# Altium PCB Tigershark 3D R2.PcbDoc (part 2 of 4)
Units mil, origin at the board's own origin, x right, y up, seen from the top; angles counter-clockwise.
Board outline 4100 x 4050 mil, 4 copper layers (Top Layer, Groun Plane, Power Plane, Bottom Layer), stack 61.73 mil thick; 349 components, 235 nets, 1133 pads, 579 vias.
Unrouted connection lines stored in the file: 67.
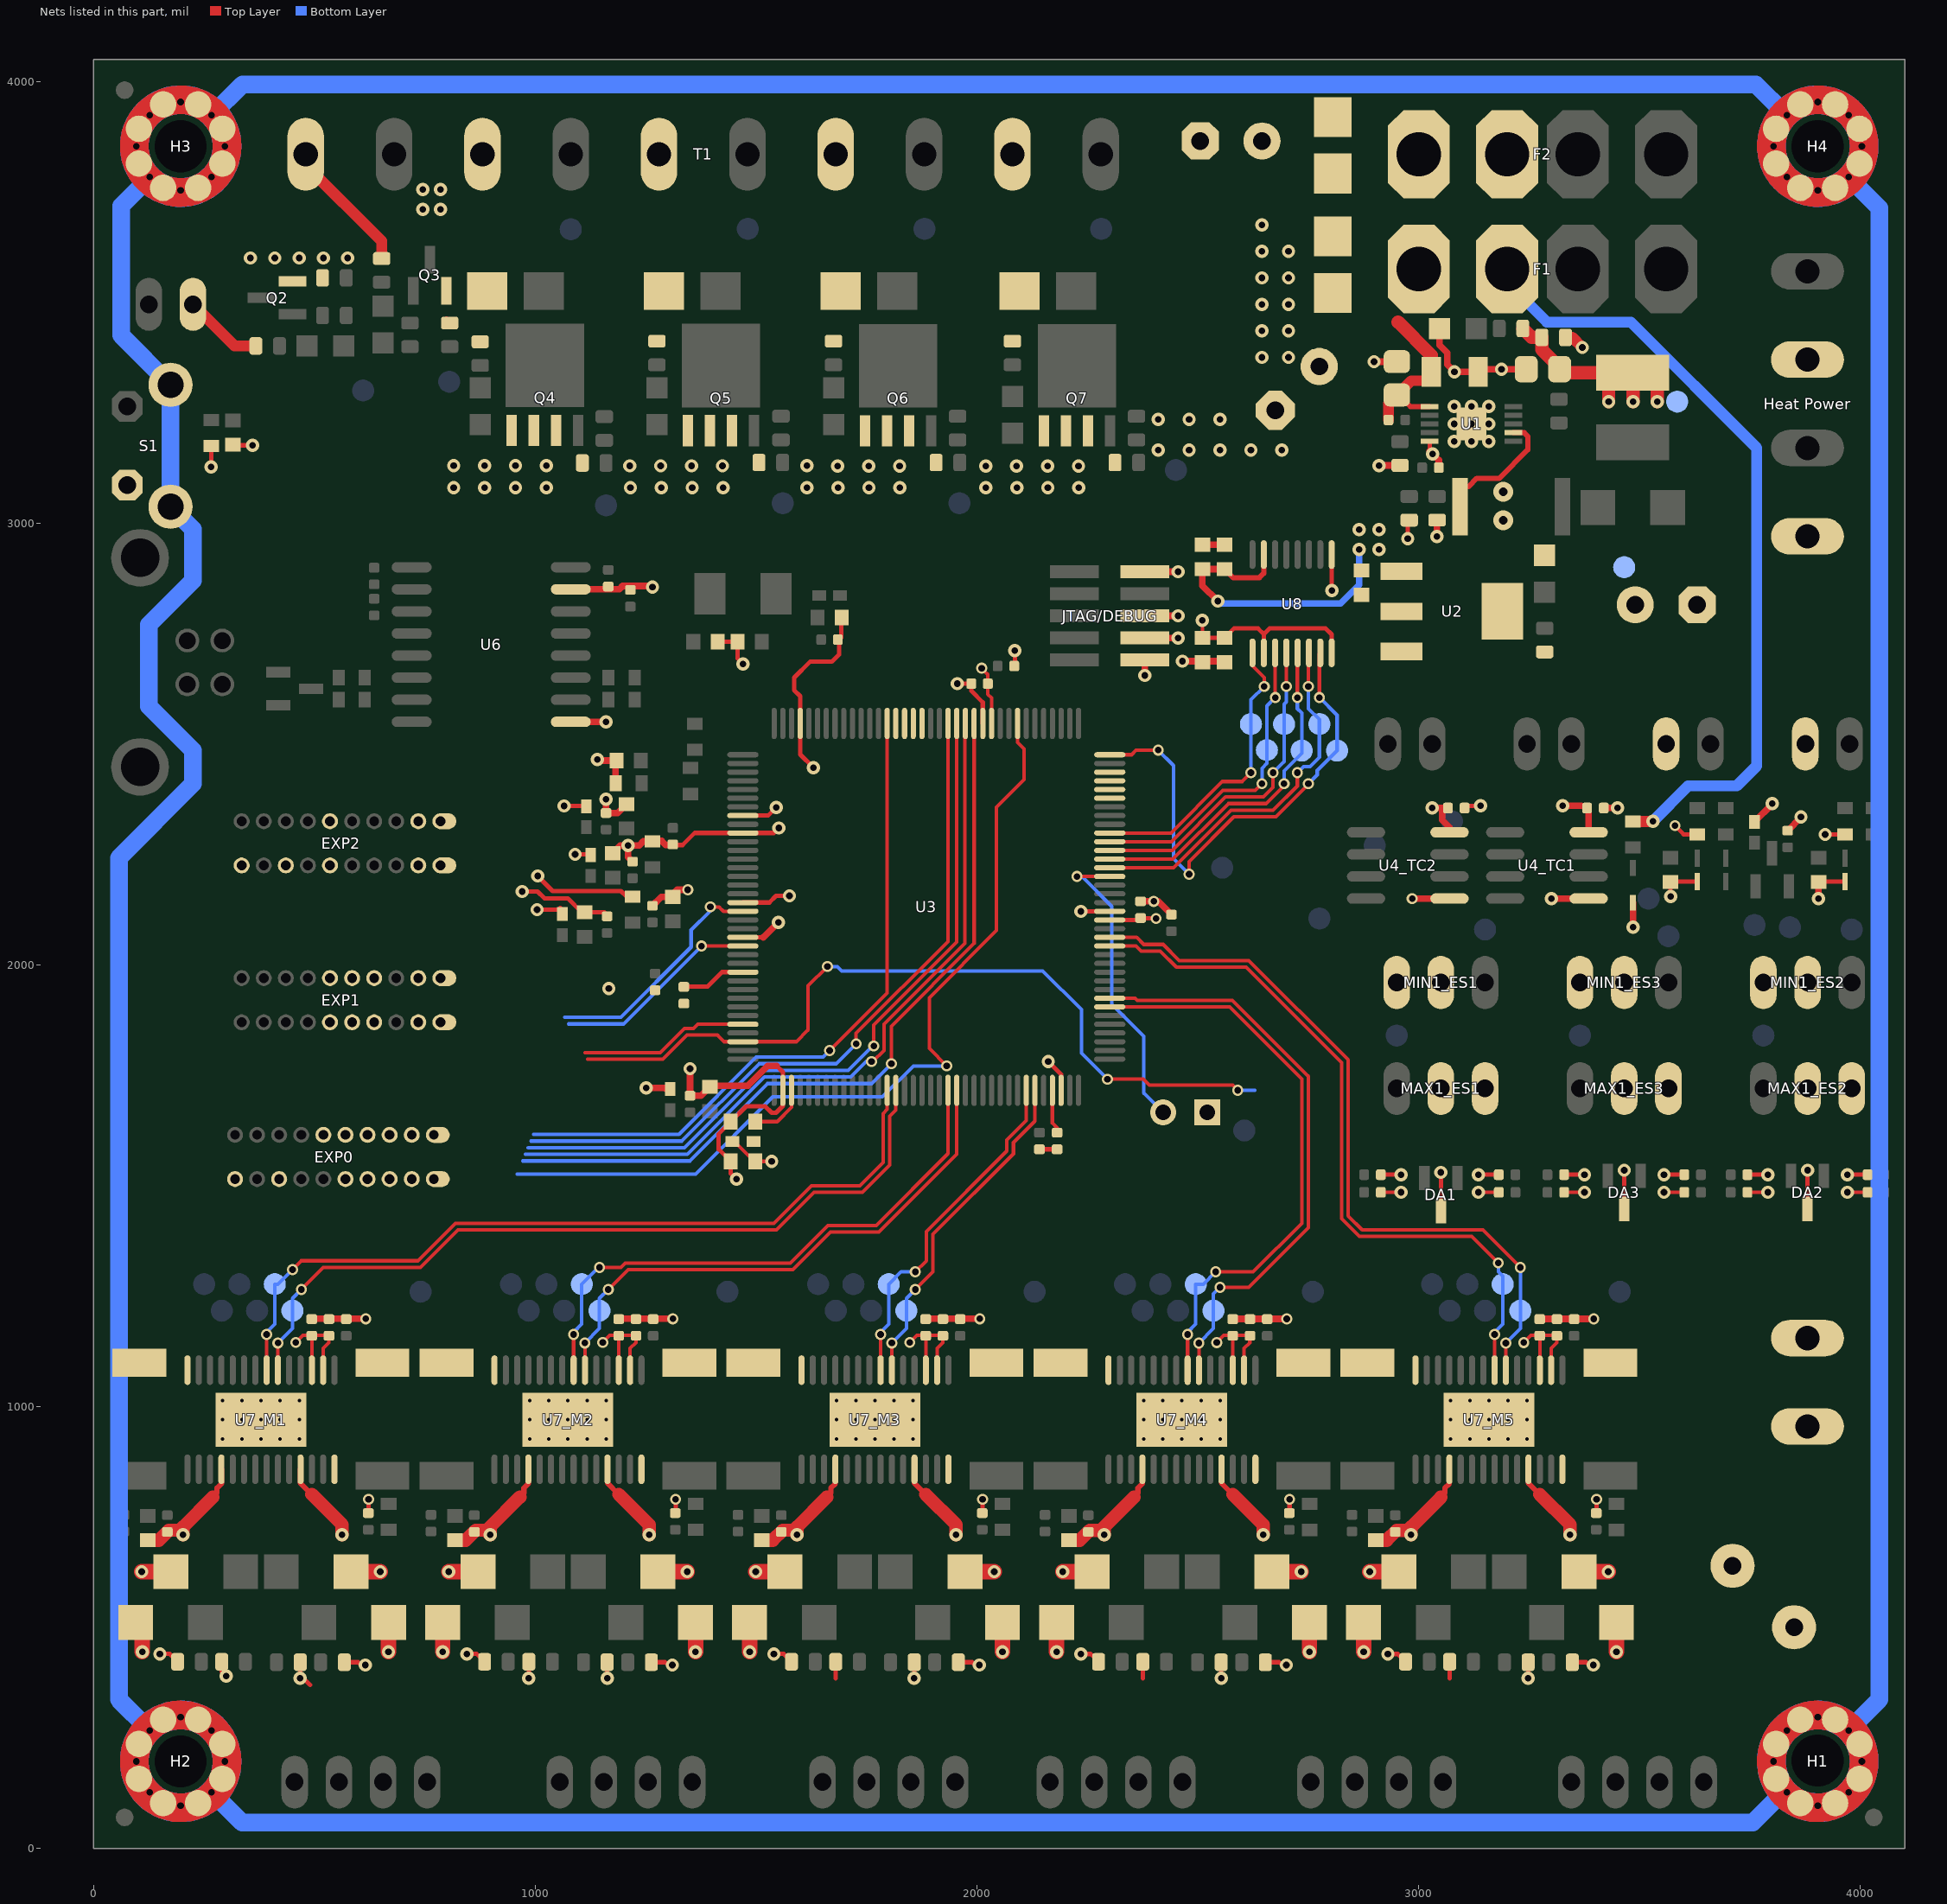
[diagram p4: the nets of this part, all layers, seen from the top]

## Footprints (in the part's own frame and the unit in brackets; to place one, negate y for a bottom-side part, rotate by r counter-clockwise, add the part's x,y. Pads: shape width x height; smd on the part's side, far side on the other; paste and mask are expansions set on the pad) (continued)
LQFP144_N [mm] "Thin QFP, 144-Leads, Body 20x20mm, Pitch 0.5mm, IPC Medium Density"
  oval 1.8x0.3 smd: 1(-10.55,8.75) 2(-10.55,8.25) 3(-10.55,7.75) 4(-10.55,7.25) 5(-10.55,6.75) 6(-10.55,6.25) 7(-10.55,5.75) 8(-10.55,5.25) 9(-10.55,4.75) 10(-10.55,4.25) 11(-10.55,3.75) 12(-10.55,3.25) 13(-10.55,2.75) 14(-10.55,2.25) 15(-10.55,1.75) 16(-10.55,1.25) 17(-10.55,0.75) 18(-10.55,0.25) 19(-10.55,-0.25) 20(-10.55,-0.75) 21(-10.55,-1.25) 22(-10.55,-1.75) 23(-10.55,-2.25) 24(-10.55,-2.75) 25(-10.55,-3.25) 26(-10.55,-3.75) 27(-10.55,-4.25) 28(-10.55,-4.75) 29(-10.55,-5.25) 30(-10.55,-5.75) 31(-10.55,-6.25) 32(-10.55,-6.75) 33(-10.55,-7.25) 34(-10.55,-7.75) 35(-10.55,-8.25) 36(-10.55,-8.75) 73(10.55,-8.75) 74(10.55,-8.25) 75(10.55,-7.75) 76(10.55,-7.25) 77(10.55,-6.75) 78(10.55,-6.25) 79(10.55,-5.75) 80(10.55,-5.25) 81(10.55,-4.75) 82(10.55,-4.25) 83(10.55,-3.75) 84(10.55,-3.25) 85(10.55,-2.75) 86(10.55,-2.25) 87(10.55,-1.75) 88(10.55,-1.25) 89(10.55,-0.75) 90(10.55,-0.25) 91(10.55,0.25) 92(10.55,0.75) 93(10.55,1.25) 94(10.55,1.75) 95(10.55,2.25) 96(10.55,2.75) 97(10.55,3.25) 98(10.55,3.75) 99(10.55,4.25) 100(10.55,4.75) 101(10.55,5.25) 102(10.55,5.75) 103(10.55,6.25) 104(10.55,6.75) 105(10.55,7.25) 106(10.55,7.75) 107(10.55,8.25) 108(10.55,8.75)
  oval 0.3x1.8 smd: 37(-8.75,-10.55) 38(-8.25,-10.55) 39(-7.75,-10.55) 40(-7.25,-10.55) 41(-6.75,-10.55) 42(-6.25,-10.55) 43(-5.75,-10.55) 44(-5.25,-10.55) 45(-4.75,-10.55) 46(-4.25,-10.55) 47(-3.75,-10.55) 48(-3.25,-10.55) 49(-2.75,-10.55) 50(-2.25,-10.55) 51(-1.75,-10.55) 52(-1.25,-10.55) 53(-0.75,-10.55) 54(-0.25,-10.55) 55(0.25,-10.55) 56(0.75,-10.55) 57(1.25,-10.55) 58(1.75,-10.55) 59(2.25,-10.55) 60(2.75,-10.55) 61(3.25,-10.55) 62(3.75,-10.55) 63(4.25,-10.55) 64(4.75,-10.55) 65(5.25,-10.55) 66(5.75,-10.55) 67(6.25,-10.55) 68(6.75,-10.55) 69(7.25,-10.55) 70(7.75,-10.55) 71(8.25,-10.55) 72(8.75,-10.55) 109(8.75,10.55) 110(8.25,10.55) 111(7.75,10.55) 112(7.25,10.55) 113(6.75,10.55) 114(6.25,10.55) 115(5.75,10.55) 116(5.25,10.55) 117(4.75,10.55) 118(4.25,10.55) 119(3.75,10.55) 120(3.25,10.55) 121(2.75,10.55) 122(2.25,10.55) 123(1.75,10.55) 124(1.25,10.55) 125(0.75,10.55) 126(0.25,10.55) 127(-0.25,10.55) 128(-0.75,10.55) 129(-1.25,10.55) 130(-1.75,10.55) 131(-2.25,10.55) 132(-2.75,10.55) 133(-3.25,10.55) 134(-3.75,10.55) 135(-4.25,10.55) 136(-4.75,10.55) 137(-5.25,10.55) 138(-5.75,10.55) 139(-6.25,10.55) 140(-6.75,10.55) 141(-7.25,10.55) 142(-7.75,10.55) 143(-8.25,10.55) 144(-8.75,10.55)
  silkscreen extent -10.67,-9.25 9.25,9.58, body extent -10,-10 10,10, height 1.6
MAXM-S8+4_N [mm] "SOIC, 8-Leads, Body 4.9x3.9mm, Pitch 1.27mm, IPC Medium Density"
  oval 2.2x0.6 smd: 1(-2.4,1.905) 2(-2.4,0.635) 3(-2.4,-0.635) 4(-2.4,-1.905) 5(2.4,-1.905) 6(2.4,-0.635) 7(2.4,0.635) 8(2.4,1.905)
  silkscreen extent -2.53,-2.5 0.9,2.88, body extent -2,-2.5 2,2.5, height 1.75
"MSTBV2 - duplicate" [mil]
  oval 82.5x165 hole 55: 1(-300,0) 2(-100,0)
  silkscreen extent -425,-150 25,180, body extent -425,-150 25,180, height 472
MSTBV4 [mil]
  oval 82.5x165 hole 55: 1(-300,0) 2(-100,0) 3(100,0) 4(300,0)
  silkscreen extent -425,-150 425,180, body extent -428,-153 428,183, height 472
MSTBV10 [mil]
  oval 82.5x165 hole 55: 1(-900,0) 2(-700,0) 3(-500,0) 4(-300,0) 5(-100,0) 6(100,0) 7(300,0) 8(500,0) 9(700,0) 10(900,0)
  silkscreen extent -1025,-150 1025,180, body extent -1028,-153 1025,183, height 472
OSHW_8X150_NOTEXT [mil]
  silkscreen extent 0,0 167,150, body extent 0,2 168,148
PN61729 [mil]
  round 54 hole 38: 1(50,186) 2(-49.21,186) 3(-49.21,107) 4(50,107)
  round 130.5 hole 87: 5(-236.22,0) 6(237,0)
  body extent -237,-405 238,226, height 406
PSMN7R0-60YS [mm] "TO, 5-Pads, Body 5.15x5.86mm (max), IPC Medium Density"
  rect 1.8x0.6 smd: 1(-2.6,1.905) 2(-2.6,0.635) 3(-2.6,-0.635) 4(-2.6,-1.905)
  rect 4.8x4.5 smd: 5(1.14,0)
  silkscreen extent -2.72,2.63 -2.48,2.88, body extent -1.85,-2.5 2.25,2.5, height 1.2
R0402 [mil]
  rrect40% 22x24 smd: 1(-18.9,0) 2(19,0)
  body extent -20,-10 20,10, height 14
R0603 [mm]
  rrect40% 0.74x1 smd: 1(-0.68,0) 2(0.68,0)
  body extent -0.8,-0.4 0.8,0.4, height 0.8
Resistor2512 [mm]
  rect 1.6x3.1 smd: 1(-3.25,0) 2(3.25,0)
  silkscreen extent -2.26,-1.3 2.26,1.3, body extent -3.24,-1.4 3.24,1.4, height 0.9
SK310A-TP [mm] "Molded Diode, 2-Leads, Body 4.31x2.69mm, IPC Medium Density"
  rect 2.3x2.15 smd: 1(-1.625,0) 2(1.625,0)
  silkscreen extent -2.3,-1.45 3.07,1.75, body extent -2.29,-1.42 2.28,1.42, height 2.95
SMA-SM [mil]
  rect 79x79 smd: A(79,0) C(-78.74,0)
  silkscreen extent -89,-49 89,50, body extent -105,-54 105,55, height 116
SOT95P230X110-3N [mm] "SOT23, 3-Leads, Body 2.90x2.30mm, Pitch 0.95mm, IPC Medium Density"
  rect 1.4x0.6 smd: 1(-0.95,0.95) 2(-0.95,-0.95) 3(0.95,0)
  silkscreen extent -1.07,-1.5 0.7,1.93, body extent -0.7,-1.5 0.7,1.5, height 1.1
SOT230P700X190-4N [mm] "SOT223, 4-Leads, Body 6.50x7.00mm (avg), Pitch 2.30mm, IPC Medium Density"
  rect 2.4x1 smd: 1(-2.9,2.3) 2(-2.9,0) 3(-2.9,-2.3)
  rect 2.4x3.25 smd: 4(2.9,0)
  silkscreen extent -3.02,-3.35 1.4,3.47, body extent -1.85,-3.35 1.85,3.35, height 1.9
SZMM3Z4V7T1G [mm] "Molded Diode, 2-Leads, Body 1.70x1.25mm, IPC Medium Density"
  rect 0.9x0.35 smd: 1(-1,0) 2(1,0)
  silkscreen extent -0.95,-0.7 1.4,0.7, body extent -0.9,-0.67 0.9,0.67, height 1
TP-2#1 [mil]
  round 50 smd far side: 1(0,0)
TP-2#2 [mil]
  round 50 smd: 1(0,0)
TSOP65P640X120-16N [mm] "TSOP, 16-Leads, Body 5.00x4.40mm, Pitch 0.65mm, IPC Medium Density"
  oval 1.65x0.35 smd: 1(-2.825,2.275) 2(-2.825,1.625) 3(-2.825,0.975) 4(-2.825,0.325) 5(-2.825,-0.325) 6(-2.825,-0.975) 7(-2.825,-1.625) 8(-2.825,-2.275) 9(2.825,-2.275) 10(2.825,-1.625) 11(2.825,-0.975) 12(2.825,-0.325) 13(2.825,0.325) 14(2.825,0.975) 15(2.825,1.625) 16(2.825,2.275)
  silkscreen extent -2.95,-2.55 1.6,3.12, body extent -2.25,-2.55 2.25,2.55, height 1.2
VSSOP10 [mm] "TSSOP, 10-Leads, Body 3.15x3.00mm, Pitch 0.50mm, Thermal Pad 2.05.2x1.50.2mm, IPC High Density"
  rect 1.02x0.3 smd mask+0.102: 1(-2.4,1) 2(-2.4,0.5) 3(-2.4,0) 4(-2.4,-0.5) 5(-2.4,-1) 6(2.4,-1) 7(2.4,-0.5) 8(2.4,0) 9(2.4,0.5) 10(2.4,1)
  rect 1.73x1.9 smd: 11(0,0)
  silkscreen extent -2.02,-1.7 0.65,1.82, body extent -1.55,-1.7 1.55,1.7, height 1.09
Wave_hole_3x7-singleSided#1 [mil]
  round 0 hole 118.11 unplated paste+0 mask-112: 0(0,1.85)
  round 0 hole 15 paste-20 mask-20: 1(-100,0) 1(-70,-70) 1(-70,70) 1(0,-100) 1(0,100) 1(70,-70) 1(70,70) 1(100,0)
  round 60 smd paste-5 mask+0: 1(-94.49,-39.37) 1(-94.49,39.37) 1(-39.37,-94.49) 1(-39.37,94.49) 1(39.37,-94.49) 1(39.37,94.49) 1(94.49,-39.37) 1(94.49,39.37)
  Top Layer circle w64.96: c0,0 r105
  Bottom Layer lines w64.96: -78.26,-70 ccw(c0,0) 105,0 ccw(c0,0) 74.25,74.25 ccw(c0,0) -78.26,-70
  body extent -105,-105 105,105
Wave_hole_3x7-singleSided#2 [mil]
  round 0 hole 118.11 unplated paste+0 mask-112: 0(0,0)
  round 0 hole 15 paste-20 mask-20: 1(-100,0) 1(-70,-70) 1(-70,70) 1(0,-100) 1(0,100) 1(70,-70) 1(70,70) 1(100,0)
  round 60 smd paste-5 mask+0: 1(-94.49,-39.37) 1(-94.49,39.37) 1(-39.37,-94.49) 1(-39.37,94.49) 1(39.37,-94.49) 1(39.37,94.49) 1(94.49,-39.37) 1(94.49,39.37)
  Top Layer circle w64.96: c0,0 r105
  Bottom Layer lines w64.96: -74.25,74.25 ccw(c0,0) 74.25,-74.25 ccw(c0,0) 105,0 ccw(c0,0) -74.25,74.25
  body extent -105,-105 105,105
XAL50xx-153 [mm] "Precision Wire Wound Inductor, 2-Leads, Body 5.28x5.48mm, IPC High Density"
  rect 2.05x4.2 smd: 1(-2,0) 2(2,0)
  silkscreen extent -2.75,-2.85 2.75,2.85, body extent -2.74,-2.84 2.74,2.84, height 4.25

## Part data
C1_ES1 C1_ES2 C1_ES3 C2_ES1 C2_ES2 C2_ES3 C71_M1 C71_M2 C71_M3 C71_M4 C71_M5: library part GRM155R60J474KE19D, "0.47uF 6.3v C0402 - GRM155R60J474KE19D"
C3_M1 C3_M2 C3_M3 C3_M4 C3_M5 C5_M1 C5_M2 C5_M3 C5_M4 C5_M5 C6_M1 C6_M2 C6_M3 C6_M4 C6_M5 C8_M1 C8_M2 C8_M3 C8_M4 C8_M5: library part CC0603ZRY5V6BB105, "CAP CER 0603 1uF 10V Y5V"
C4 C13 C17 C20 C25 C26 C28 C32 C36 C43 C44 C55 C60 C64 C65 C66_M1 C66_M2 C66_M3 C66_M4 C66_M5 C73: library part "Cap Semi", "Capacitor (Semiconductor SIM Model)"
C7: library part UPW1H471MHD1TO, "CAP ALU 470uF 50V 20%"
C9: library part C1206C475K5PACTU, "CAP CER 1206 4.7uF 50V 10% X5R"
C10: library part GRM21BR71H105KA12L, "CAP CER 0805 1uF 50V 10% X7R"
C11 C40: library part C0603C104K5RACTU, "CAP CER 0603 100nF 50V 10% X7R"
C12_M1 C12_M2 C12_M3 C12_M4 C12_M5 C14_M1 C14_M2 C14_M3 C14_M4 C14_M5 C19 C23 C27 C31_TC1 C31_TC2 C33 C37 C38 C39 C41 C42 C45 C46 C47 C48 C53 C54 C56 C57 C58 C59 C61 C75_M1 C75_M2 C75_M3 C75_M4 C75_M5: library part "100nF C0402 - GRM155R71C104KA88D", "Capacitor (Semiconductor SIM Model)"
C15 C16 C18: library part UVZ1H101MPD1TD, "CAP ALU 100uF 50V 20% 105C"
C21: library part C0805C106K8PACTU, "CAP CER 0805 10uF 10V 10% X5R"
C22: library part GRM155R60J105KE19D, "CAP CER 0402 1uF 6.3V 10% X5R"
C30_TR1 C30_TR2 C63: "Capacitor (Semiconductor SIM Model)"
C68_M1 C68_M2 C68_M3 C68_M4 C68_M5: library part GRM155R71H103JA88D, "CAP CER 10000PF 50V X7R 0402"
D1: library part "D Zener", "Zener Diode"
D2: library part SK310A, "DIODE Schottky 3A SMA"
D3_TR1 D3_TR2 D5_TR1 D5_TR2: "High Conductance Fast Diode"
D4 D6 D12 D15 D17 D19: library part "D Schottky", "Schottky Diode"
D7 D9: "LED 0805 Red"
D10 D11 D13 D14 D16 D18: "LED 0805 Yellow"
D20_M1 D20_M2 D20_M3 D20_M4 D20_M5 D21_M1 D21_M2 D21_M3 D21_M4 D21_M5 D22_M1 D22_M2 D22_M3 D22_M4 D22_M5 D23_M1 D23_M2 D23_M3 D23_M4 D23_M5: "DIODE TVS 30V SMA"
DA1 DA2 DA3 DA4 DA5: "PESDxL2BT TVS Diode Array 2x"
F1 F2: library part "Fuse 1", "Fuse"
"Heat Power": library part con-phoenix-508_4
JTAG/DEBUG: library part "ARM Cortex JTAG-DEBUG Header"
L1: "IND 15uH 3.9A 20%"
M1_M1 M1_M2 M1_M3 M1_M4 M1_M5 M1_M6: library part "Molex 0705430003 Alt", "Molex 4 Pin Clip Connector"
MAX1_ES1 MAX1_ES2 MAX1_ES3 MIN1_ES1 MIN1_ES2 MIN1_ES3: library part "Molex Endstop"
"Motor Power": library part con-phoenix-508_2
P1: library part "Header 2", "Header, 2-Pin"
Q2 Q3 Q4 Q5 Q6 Q7: "N-Channel MOSFET"
R1 R14_TR1 R14_TR2 R19_TR1 R19_TR2 R21: "Resistor"
R2_ES1 R2_ES2 R2_ES3 R3_ES1 R3_ES2 R3_ES3: library part ERJ-2GEJ272X, "RES SMD 2.7K OHM 5% 1/10W 0402"
R4 R5 R6 R15 R16 R18 R20 R22 R23 R31_M1 R31_M2 R31_M3 R31_M4 R31_M5 R32_M1 R32_M2 R32_M3 R32_M4 R32_M5 R33_M1 R33_M2 R33_M3 R33_M4 R33_M5: library part Res3, "Resistor"
R7 R10 R12: library part ERJ-3EKF1002V, "RES 0603 10K 100mW 1%"
R8 R11: library part ERJ-3EKF1001V, "RES 0603 1K 100mW 1%"
R9: library part RL2512FK-070R06L, "RES 0.06 OHM 1W 1% 2512 SMD"
R13 R47 R56 R60 R64 R68: library part RC0603JR-071K8L, "RES 0603 1.8K 100mW 5%"
R17: library part CRCW0402200KFKED, "RES 0402 22r 63mW 1%"
R30_M1 R30_M2 R30_M3 R30_M4 R30_M5: library part ERJ2GEJ105X, "RES 0402 1M 100mW 5%"
R45 R52 R58 R62 R66 R70: library part CRCW060310R0FKEA, "RES 0603 10r 100mW 1%"
R46 R55 R59 R63 R67 R71: library part RC0603FR-07100KL, "RES 100K OHM 1/10W 1% 0603 SMD"
S1: library part 1571610-2_1, "SWTCH Momentary Washable"
T1: library part "0395311010 - Molex 10 Position Connector", "MSBTV10 10 port connector same as RAMBo"
TP1 TP2 TP3 TP4 TP5 TP6 TP7 TP8 TP9_ES1 TP9_ES2 TP9_ES3 TP10_ES1 TP10_ES2 TP10_ES3 TP11 TP12 TP13 TP14 TP32_M1 TP32_M2 TP32_M3 TP32_M4 TP32_M5 TP33_M1 TP33_M2 TP33_M3 TP33_M4 TP33_M5 TP35_M1 TP35_M2 TP35_M3 TP35_M4 TP35_M5 TP36_M1 TP36_M2 TP36_M3 TP36_M4 TP36_M5 TP37_M1 TP37_M2 TP37_M3 TP37_M4 TP37_M5 TP38 TP39_M1 TP39_M2 TP39_M3 TP39_M4 TP39_M5 TP40_M1 TP40_M2 TP40_M3 TP40_M4 TP40_M5 TP41 TP42 TP43 TP44 TP45 TP46 TP47 TP48 TP49 TP50 TP51 TP52_TR1 TP52_TR2: library part Socket, "Socket"
U1: library part LM25011, "REG BUCK"
U4_TC1 U4_TC2: "Cold Junction Compensated Thermocouple to Digital Converter, 14 Bits Temperature Resolution, -40 to 125 degC, 8-Pin SOIC (S8+4), Pb-Free"
U6: "USB Opto Isolator"
U7_M1 U7_M2 U7_M3 U7_M4 U7_M5: "DRV8825 Ti Stepper Driver"
U8: library part TXB0106, "TXB0106 - Bidriectional Opendrain/pushpull level shift"
X2: library part XTAL, "Crystal Oscillator"

## Via types
v1: diameter 30, hole 15, Top Layer to Bottom Layer, tented both sides, 304 vias
v2: diameter 25, hole 15, Top Layer to Bottom Layer, tented both sides, 108 vias
v3: diameter 25, hole 15, Top Layer to Bottom Layer, 81 vias
v4: diameter 19.68, hole 7.87, Top Layer to Bottom Layer, 75 vias
v5: diameter 30, hole 15, Top Layer to Bottom Layer, 9 vias
v6: diameter 45, hole 20, Top Layer to Bottom Layer, tented both sides, 2 vias

## Nets (pads, with @x,y where several pads share a name; then routed paths per layer and width w, separated by ;. In a path a pad name is that pad's centre, name@x,y a point inside that pad or via, vN(x,y) a via of type N, cw(c..) or ccw(c..) an arc to the next point about the centre after c; other vN are vias at no path point)
3.3VCC: C12_M1.2 C12_M2.2 C12_M3.2 C12_M4.2 C12_M5.2 C14_M1.2 C14_M2.2 C14_M3.2 C14_M4.2 C14_M5.2 C18.1 C25.2 C26.1 C31_TC1.2 C31_TC2.2 C45.2 C46.2 C47.2 C48.2 C64.2 EXP0.12 EXP1.12 EXP2.12 FB1.2 FB5.1 FB6.1 FB7.1 FB8.1 FB9.1 JTAG/DEBUG.1 MAX1_ES1.3 MAX1_ES2.3 MAX1_ES3.3 MIN1_ES1.3 MIN1_ES2.3 MIN1_ES3.3 P1.1 R2_ES1.2 R2_ES2.2 R2_ES3.2 R3_ES1.2 R3_ES2.2 R3_ES3.2 R6.1 R11.2 R19_TR1.2 R19_TR2.2 R21.2 TP3.1 U2.3 U3.11 U3.62 U3.105 U3.125 U4_TC1.4 U4_TC2.4 U7_M1.16 U7_M1.17 U7_M2.16 U7_M2.17 U7_M3.16 U7_M3.17 U7_M4.16 U7_M4.17 U7_M5.16 U7_M5.17 U8.2 U8.8 | length 3380.8
  Top Layer w8: v3(457.48,1145) 473.48,1161 C12_M1.2@492.48,1161 ; U7_M1.17@493.9,1083.46 493.9,1159.58 C12_M1.2@492.48,1161 ; U7_M1.16@517.48,1085.47 519.49,1083.46 519.49,1132.01 532.48,1145 C14_M1.2@532.48,1160 ; C14_M1.2@532.48,1161 C12_M1.2@492.48,1161 ; v3(1152.48,1145) 1168.48,1161 C12_M2.2@1187.48,1161 ; U7_M2.17@1188.9,1083.46 1188.9,1159.58 C12_M2.2@1187.48,1161 ; U7_M2.16@1212.48,1085.47 1214.49,1083.46 1214.49,1132.01 1227.48,1145 C14_M2.2@1227.48,1160 ; C14_M2.2@1227.48,1161 C12_M2.2@1187.48,1161 ; FB9.1@1446.38,1600 1450.51,1600 1495.51,1555 C64.2@1497.56,1555 v1(1535,1555) ; v3(1847.48,1145) 1863.48,1161 C12_M3.2@1882.48,1161 ; U7_M3.17@1883.9,1083.46 1883.9,1159.58 C12_M3.2@1882.48,1161 ; U7_M3.16@1907.48,1085.47 1909.49,1083.46 1909.49,1132.01 1922.48,1145 C14_M3.2@1922.48,1160 ; C14_M3.2@1922.48,1161 C12_M3.2@1882.48,1161 ; v2(2010.47,2671.46) 2024.47,2657.46 C47.2@2024.47,2636.46 2024.47,2612.46 2032.64,2604.29 U3.11@2032.64,2546.46 ; U3.105@2170.43,1715.75 2170.43,1641.77 2181.1,1631.1 C45.2@2181.1,1620.1 ; JTAG/DEBUG.1@2379.92,2690 JTAG/DEBUG.1@2380,2689.92 ; C25.2@2510,2740 v1(2510,2780) ; v3(2542.51,1144.97) 2558.51,1160.97 C12_M4.2@2577.51,1160.97 ; U7_M4.17@2578.93,1083.43 2578.93,1159.55 C12_M4.2@2577.51,1160.97 ; U7_M4.16@2602.51,1085.44 2604.52,1083.43 2604.52,1131.98 2617.51,1144.97 C14_M4.2@2617.51,1159.97 ; C14_M4.2@2617.51,1160.97 C12_M4.2@2577.51,1160.97 ; R3_ES1.2@2914,1485 v1(2960,1485) ; v1(3135,1485) R2_ES1.2@3181,1485 ; v3(3237.51,1144.97) 3253.51,1160.97 C12_M5.2@3272.51,1160.97 ; U7_M5.17@3273.93,1083.43 3273.93,1159.55 C12_M5.2@3272.51,1160.97 ; U7_M5.16@3297.51,1085.44 3299.52,1083.43 3299.52,1131.98 3312.51,1144.97 C14_M5.2@3312.51,1159.97 ; C14_M5.2@3312.51,1160.97 C12_M5.2@3272.51,1160.97 ; R3_ES3.2@3329,1485 v1(3375,1485) ; v1(3555,1485) R2_ES3.2@3601,1485 ; R3_ES2.2@3744,1485 v1(3790,1485) ; v1(3970,1485) R2_ES2.2@4016,1485
  Top Layer w10: v1(266,3127) R21.2@266,3174.47 ; v1(1004,2124.72) 1056.22,2124.72 FB5.1@1056.22,2128.9 ; v1(1005,2201.1) 1039,2167.1 1193.53,2167.1 R6.1@1205,2155.63 ; v1(1065,2359.72) FB8.1@1105,2359.72 ; v1@1090,2244.72 v1(1090,2250) 1123.62,2250 FB7.1@1125,2248.62 ; C48.2@1336.1,1951.1 1390.14,1951.1 1422.51,1983.46 U3.62@1469.65,1983.46 ; U3.125@2300.35,2101.57 C46.2@2365.57,2101.57 ; C46.2@2371,2105 v2(2405,2105) ; C25.2@2510,2740 C26.1@2560,2740 2581.44,2761.44 2636,2761.44 2649.02,2748.42 ; U8.2@2649.02,2706.22 2649.02,2748.42 ; U8.8@2802.57,2706.22 2802.57,2747.87 2789,2761.44 2662.05,2761.44 2649.02,2748.42 ; 3367.95,2360 C31_TC1.2@3384.49,2343.46 ; v2(3580,2315) 3599.53,2295.47 R19_TR2.2@3630,2295.47 ; v1(3920,2295) 3964.53,2295 R19_TR1.2@3965,2295.47
  Top Layer w15: v1(1251.1,1721.1) 1293.62,1721.1 FB6.1@1295,1719.72 ; C46.2@2370,2106 C46.2@2371,2105 ; v1(2380,2655) JTAG/DEBUG.1@2380,2689.92 ; v1@3025,2360 3025,2355 3052.95,2355 ; C31_TC2.2@3056,2355 3052.95,2355 ; U4_TC2.4@3069.49,2300 3069.49,2311.02 3052.95,2327.56 3052.95,2355 ; v1(3325.51,2360) 3367.95,2360 ; U4_TC1.4@3384.49,2300 C31_TC1.2@3384.49,2343.46 ; FB1.2@3760,2323.62 3800,2363.62 v1(3800,2365)
  other v1: 1166.1,1946.1 3030,2355
+5VCC: C4.2 C11.1 C17.1 C20.1 C21.1 EXP0.9 EXP1.9 EXP2.9 L1.2 R7.2 R8.2 R10.1 TP1.1 U2.1 U8.15 | length 1272.3
  Top Layer w12: C17.1@2560,2895.88 2579.44,2876.44 2639,2876.44 2649.02,2886.46 U8.15@2649.02,2928.66
  Top Layer w15: v1(2545,2823.44) 2510,2858.44 C20.1@2510,2895.88 C17.1@2560,2895.88 ; v1@2909.31,3130.43 2957.09,3130.43 R7.2@2957.32,3130.65 ; v1(3041.31,2969.43) R10.1@3041.31,3006.66
  Top Layer w30: R8.2@3235.54,3440.43 3255.54,3420.43 C11.1@3278.54,3420.43 3278.54,3392.69 3318.72,3352.52 C21.1@3318.72,3348.43 ; C21.1@3326.98,3340.17 L1.2@3484.31,3340.17 ; v1(3430,3275) L1.2@3430,3335.17 ; v1(3485,3275) L1.2@3485,3339.48 ; v1(3540,3275) L1.2@3540,3340
  Bottom Layer w15: v1(2545,2823.44) 2550.5,2817.94 2822.94,2817.94 2865,2860 v1(2865,2940)
  other v1: 2910,2940 2865,2985 2910,2985 2910,3130
+12VCC1: "Motor Power.1" C7.1 C66_M1.1 C66_M2.1 C66_M3.1 C66_M4.1 C66_M5.1 R30_M1.2 R30_M2.2 R30_M3.2 R30_M4.2 R30_M5.2 U7_M1.4 U7_M1.11 U7_M2.4 U7_M2.11 U7_M3.4 U7_M3.11 U7_M4.4 U7_M4.11 U7_M5.4 U7_M5.11 | length 2332.6
  Top Layer w12: 270,795 279,804 279,815.51 289.17,825.68 U7_M1.4@289.17,858.06 U7_M1.4@289.17,859.06 ; U7_M1.11@468.31,859.06 468.31,826.69 493.74,801.26 ; 965,795 974,804 974,815.51 984.17,825.68 U7_M2.4@984.17,858.06 U7_M2.4@984.17,859.06 ; U7_M2.11@1163.31,859.06 1163.31,826.69 1188.74,801.26 ; 1660,795 1669,804 1669,815.51 1679.17,825.68 U7_M3.4@1679.17,858.06 U7_M3.4@1679.17,859.06 ; U7_M3.11@1858.31,859.06 1858.31,826.69 1883.74,801.26 ; 2355.03,794.97 2364.03,803.97 2364.03,815.48 2374.2,825.65 U7_M4.4@2374.2,858.02 U7_M4.4@2374.2,859.02 ; U7_M4.11@2553.34,859.02 2553.34,826.66 2578.77,801.23 ; 3050.03,794.97 3059.03,803.97 3059.03,815.48 3069.2,825.65 U7_M5.4@3069.2,858.02 U7_M5.4@3069.2,859.02 ; U7_M5.11@3248.34,859.02 3248.34,826.66 3273.77,801.23
  Top Layer w30: C66_M1.1@122.48,697.44 147.44,697.44 170,720 192.48,720 v1(202.48,710) 202.48,727.48 270,795 ; 493.74,801.26 562.48,732.52 v1(562.48,710) ; C66_M2.1@817.48,697.44 842.44,697.44 865,720 887.48,720 v1(897.48,710) 897.48,727.48 965,795 ; 1188.74,801.26 1257.48,732.52 v1(1257.48,710) ; C66_M3.1@1512.48,697.44 1537.44,697.44 1560,720 1582.48,720 v1(1592.48,710) 1592.48,727.48 1660,795 ; 1883.74,801.26 1952.48,732.52 v1(1952.48,710) ; C66_M4.1@2207.51,697.41 2232.47,697.41 2255.03,719.97 2277.51,719.97 v1(2287.51,709.97) 2287.51,727.45 2355.03,794.97 ; 2578.77,801.23 2647.51,732.49 v1(2647.51,709.97) ; C66_M5.1@2902.51,697.41 2927.47,697.41 2950.03,719.97 2972.51,719.97 v1(2982.51,709.97) 2982.51,727.45 3050.03,794.97 ; 3273.77,801.23 3342.51,732.49 v1(3342.51,709.97)
+12VCC2: C9.1 C10.1 C16.1 D6.2 D12.2 D15.2 D17.2 F1.2 FAN-1.1 R1.2 R13.2 R17.2 R47.2 R56.2 R60.2 R64.2 T1.1 T1.3 T1.5 T1.7 U1.1 | length 2575.2
  Top Layer w12: C10.1@2971.68,3272.95 2980.83,3263.8 U1.1@3024.83,3263.8
  Top Layer w24: R17.2@2931.31,3233.43 C10.1@2931.31,3271.02 ; C10.1@2950.31,3290.02 2982.72,3322.43 C9.1@3008.15,3322.43
  Top Layer w25: FAN-1.1@225,3495 319,3401 R13.2@367.23,3401 ; T1.1@480,3810 652,3638 R47.2@652,3598.77 ; R1.2@3485,2324.53 3529.53,2324.53 v1(3530,2325)
  Top Layer w30: 2953.21,3454.87 3028.17,3379.91 C9.1@3028.17,3342.43
  Bottom Layer w25: F1.2@3200,3575 3200,3545 3290,3455 3480,3455 3765,3170 3765,2450 3720,2405 3610,2405 v1(3530,2325)
+12VCC3: C15.1 D4.2 D19.2 F2.2 R68.2 T1.9
AN_EXP0: EXP1.7 U3.14 | length 1725.7
  Top Layer w8: v2(1761.1,1781.1) 1764.34,1781.1 1789.6,1806.37 1789.6,1865.82 1972.1,2048.32 1972.1,2544.98 U3.14@1973.58,2546.46
  Bottom Layer w8: 977.61,1571.1 1343.82,1571.1 1518.82,1746.1 1714.08,1746.1 1749.08,1781.1 v2(1761.1,1781.1)
AN_EXP1: EXP1.14 U3.15 | length 1685.7
  Top Layer w8: v2(1766.1,1816.1) 1766.1,1863.53 1953.9,2051.32 U3.15@1953.9,2546.46
  Bottom Layer w8: 983.82,1586.1 1337.61,1586.1 1512.61,1761.1 1707.87,1761.1 1762.87,1816.1 v2(1766.1,1816.1)
AVREF: C65.2 FB9.2 U3.75 | length 134
  Top Layer w8: C65.2@1497.56,1645 1547.24,1645 1579.88,1677.64 U3.75@1579.88,1715.75
BED_PWM: TP38.1 U3.144 U8.7 | length 1137.1
  Top Layer w8: U3.144@2300.35,2475.59 2349.49,2475.59 2360,2486.1 v2(2410,2486.1) ; v2(2480,2205) 2480,2233.79 2581.21,2335 2676.21,2335 2750,2408.79 v2(2750,2410) ; v2(2775,2605) 2775,2704.24 U8.7@2776.98,2706.22
  Bottom Layer w8: v2(2410,2486.1) 2445,2451.1 2445,2240 v2(2480,2205) ; v2(2750,2410) 2770,2430 2770,2440 TP38.1@2815,2485 2815,2565 v2(2775,2605)
DIR1: TP39_M1.1 U3.87 U7_M1.20 | length 1827.1
  Top Layer w8: U7_M1.20@417.13,1083.46 v3(417.13,1143.9) ; v3(470,1265) 520,1315 740,1315 825,1400 1546.07,1400 1631.07,1485 1740.44,1485 1802.05,1546.61 1802.05,1657.05 1816.1,1671.1 U3.87@1816.1,1715.75
  Bottom Layer w8: v3(417.13,1143.9) 449.97,1176.74 TP39_M1.1@449.97,1217.03 449.97,1244.97 v3(470,1265)
DIR2: TP39_M2.1 U3.94 U7_M2.20 | length 1263.7
  Top Layer w8: U7_M2.20@1112.13,1083.46 v3(1112.13,1143.9) ; v3(1165,1265) 1210,1310 1583.35,1310 1668.35,1395 1777.72,1395 1953.9,1571.18 U3.94@1953.9,1715.75
  Bottom Layer w8: v3(1112.13,1143.9) 1144.97,1176.74 TP39_M2.1@1144.97,1217.03 1144.97,1244.97 v3(1165,1265)
DIR3: TP39_M3.1 U3.103 U7_M3.20 | length 766.5
  Top Layer w8: U7_M3.20@1807.13,1083.46 v3(1807.13,1143.9) ; v3(1860,1265) 1900,1305 1900,1390 2082.32,1572.32 2082.32,1597.32 2131.06,1646.06 U3.103@2131.06,1715.75
  Bottom Layer w8: v3(1807.13,1143.9) 1839.97,1176.74 TP39_M3.1@1839.97,1217.03 1839.97,1244.97 v3(1860,1265)
DIR4: TP39_M4.1 U3.116 U7_M4.20 | length 1327.9
  Top Layer w8: U3.116@2300.35,1924.41 2357.8,1924.41 2362.48,1919.72 2578,1919.72 2750,1747.72 2750,1405 2615,1270 v3(2550,1270) ; U7_M4.20@2502.16,1083.43 v3(2502.16,1143.87)
  Bottom Layer w8: v3(2502.16,1143.87) 2535,1176.71 TP39_M4.1@2535,1217 2535,1255 v3(2550,1270)
DIR5: TP39_M5.1 U3.123 U7_M5.20 | length 1691.2
  Top Layer w8: U3.123@2300.35,2062.2 2361.21,2062.2 2377.32,2046.1 2420.94,2046.1 2457.32,2009.72 2615.28,2009.72 2840,1785 2840,1431.77 2871.77,1400 3145,1400 v3(3230,1315) ; U7_M5.20@3197.16,1083.43 v3(3197.16,1143.87)
  Bottom Layer w8: v3(3197.16,1143.87) 3230,1176.71 TP39_M5.1@3230,1217 v3(3230,1315)
DIR_EXP1: EXP1.6 U3.13 | length 1773.7
  Top Layer w8: v2(1806.1,1776.1) 1806.1,1861.1 1993.27,2048.27 U3.13@1993.27,2546.46
  Bottom Layer w8: 971.4,1556.1 1350.04,1556.1 1525.04,1731.1 1761.1,1731.1 v2(1806.1,1776.1)
DIR_EXP2: EXP1.15 U3.16 | length 1638.7
  Top Layer w8: v2(1726.1,1821.1) 1726.1,1844.74 1934.21,2052.85 U3.16@1934.21,2546.46
  Bottom Layer w8: 990.04,1601.1 1331.4,1601.1 1506.4,1776.1 1681.1,1776.1 v2(1726.1,1821.1)
EN1: TP32_M1.1 U3.86 U7_M1.21 | length 1859.3
  Top Layer w8: U7_M1.21@391.54,1083.46 v3(391.54,1163.31) ; v3(450,1310) 470,1330 733.79,1330 818.79,1415 1539.85,1415 1624.85,1500 1734.23,1500 1787.05,1552.82 1787.05,1663.26 1796.42,1672.63 U3.86@1796.42,1715.75
  Bottom Layer w8: v3(391.54,1163.31) 391.54,1168.6 409.97,1187.03 TP32_M1.1@409.97,1277.03 417.03,1277.03 v3(450,1310)
EN2: TP32_M2.1 U3.93 U7_M2.21 | length 1296
  Top Layer w8: U7_M2.21@1086.54,1083.46 v3(1086.54,1163.31) ; v3(1145,1315) 1193.79,1315 1203.79,1325 1577.13,1325 1662.13,1410 1771.51,1410 1934.21,1572.71 U3.93@1934.21,1715.75
  Bottom Layer w8: v3(1086.54,1163.31) 1086.54,1168.6 1104.97,1187.03 TP32_M2.1@1104.97,1277.03 1142.94,1315 v3(1145,1315)
EN3: TP32_M3.1 U3.102 U7_M3.21 | length 787.7
  Top Layer w8: U7_M3.21@1781.54,1083.46 v3(1781.54,1163.31) ; v3(1860,1305) 1885,1330 1885,1396.21 2067.32,1578.54 2067.32,1603.54 2111.38,1647.59 U3.102@2111.38,1715.75
  Bottom Layer w8: v3(1781.54,1163.31) 1781.54,1168.6 1799.97,1187.03 TP32_M3.1@1799.97,1277.03 1827.94,1305 v3(1860,1305)
EN4: TP32_M4.1 U3.115 U7_M4.21 | length 1327.1
  Top Layer w8: U3.115@2300.35,1904.72 2571.78,1904.72 2735,1741.51 2735,1415 2625,1305 v3(2540,1305) ; U7_M4.21@2476.57,1083.43 v3(2476.57,1163.28)
  Bottom Layer w8: v3(2476.57,1163.28) 2476.57,1168.57 2495,1187 TP32_M4.1@2495,1277 2512,1277 v3(2540,1305)
EN5: TP32_M5.1 U3.122 U7_M5.21 | length 1637.1
  Top Layer w8: U3.122@2300.35,2042.52 2359.69,2042.52 2371.1,2031.1 2414.72,2031.1 2451.1,1994.72 2609.06,1994.72 2825,1778.79 2825,1425.55 2865.55,1385 3120,1385 v3(3180,1325) ; U7_M5.21@3171.57,1083.43 v3(3171.57,1163.28)
  Bottom Layer w8: v3(3171.57,1163.28) 3171.57,1168.57 3190,1187 TP32_M5.1@3190,1277 3190,1295 3180,1305 v3(3180,1325)
EN_EXP1: EXP1.5 U3.8 | length 1960
  Top Layer w8: v2(1931.1,1771.1) 1891.71,1810.5 1891.71,1925.5 2043.86,2077.64 2043.86,2357.04 2106,2419.18 2106,2488.78 2091.69,2503.09 U3.8@2091.69,2546.46
  Bottom Layer w8: 958.97,1526.1 1362.46,1526.1 1537.46,1701.1 1785.55,1701.1 1855.55,1771.1 v2(1931.1,1771.1)
EN_EXP2: EXP1.16 U3.23 | length 1542.9
  Top Layer w8: v2(1666.1,1806.1) 1796.42,1936.42 U3.23@1796.42,2546.46
  Bottom Layer w8: 996.25,1616.1 1325.18,1616.1 1500.18,1791.1 1651.1,1791.1 v2(1666.1,1806.1)
ERASE: P1.2 U3.130 | length 695.4
  Top Layer w8: v2(2226.1,2200) U3.130@2300.35,2200
  Bottom Layer w8: v2(2226.1,2200) 2237.2,2200 2305,2132.2 2305,1911.1 2377.5,1838.6 2377.5,1709.7 P1.2@2421.1,1666.1
EXP_CS: EXP0.1 U3.142
EXP_CS2: EXP2.1 U3.55 | length 538.9
  Top Layer w8: v2(1396.1,2131.1) 1416.1,2131.1 1425.95,2121.26 U3.55@1469.65,2121.26
  Bottom Layer w8: 1066.1,1881.1 1193.47,1881.1 1352.6,2040.23 1352.6,2078.76 1396.1,2122.26 v2(1396.1,2131.1)
EXP_INTERRUP1: EXP0.16 U3.19
EXP_INTERRUP2: EXP0.15 U3.20
EXP_SYNC: EXP0.6 U3.141
FET_PWM1: TP43.1 U3.135 U8.1 | length 670.9
  Top Layer w8: U3.135@2300.35,2298.43 2438.57,2298.43 2555.15,2415 2600,2415 v2(2620,2435) ; U8.1@2623.43,2706.22 2623.43,2676.57 2650,2650 v2(2650,2630)
  Bottom Layer w8: v2(2620,2435) TP43.1@2620,2545 2620,2600 v2(2650,2630)
FET_PWM2: TP44.1 U3.134 U8.3 | length 707.8
  Top Layer w8: U3.134@2300.35,2278.74 2440.1,2278.74 2556.36,2395 2630,2395 v2(2645,2410) ; U8.3@2674.61,2706.22 2674.61,2605.39 v2(2675,2605)
  Bottom Layer w8: v2(2645,2410) 2645,2445 2656.1,2456.1 TP44.1@2656.1,2486.1 2656.1,2586.1 v2(2675,2605)
FET_PWM3: TP45.1 U3.133 U8.4 | length 745.7
  Top Layer w8: U3.133@2300.35,2259.06 2441.63,2259.06 2562.57,2380 2648.23,2380 2670,2401.77 v2(2670,2435) ; v2(2700,2630) 2700,2706.02 U8.4@2700.2,2706.22
  Bottom Layer w8: v2(2670,2435) 2695,2460 TP45.1@2695,2545 2695,2590 2700,2595 v2(2700,2630)
FET_PWM4: TP46.1 U3.132 U8.5 | length 785.2
  Top Layer w8: U3.132@2300.35,2239.37 2443.16,2239.37 2568.79,2365 2654.45,2365 2695,2405.55 v2(2695,2410) ; v2(2725,2605) 2725,2705.42 U8.5@2725.8,2706.22
  Bottom Layer w8: v2(2695,2410) 2695,2438.79 2735,2478.79 TP46.1@2735,2485 2735,2570 2725,2580 v2(2725,2605)
FET_PWM5: TP47.1 U3.131 U8.6 | length 843.1
  Top Layer w8: U3.131@2300.35,2219.68 2444.68,2219.68 2575,2350 2670,2350 2725,2405 v2(2725,2435) ; v2(2750,2630) 2750,2704.83 U8.6@2751.39,2706.22
  Bottom Layer w8: v2(2725,2435) 2739,2449 2754,2449 2775,2470 TP47.1@2775,2545 2775,2555 2750,2580 v2(2750,2630)
FGND: H1.1 H2.1 H3.1 H4.1 S1.3 S1.4 | length 14601.7
  Bottom Layer w40: 122.6,271.1 57,336.7 57,2242 225,2410 225,2485 125,2585 125,2770 225,2870 225,2986 S1.4@174,3037 S1.3@174,3313 62,3425 62,3718.3 122.6,3778.9 ; H3.1@266.85,3923.15 336.7,3993 3763.3,3993 3828.9,3927.4 ; 271.1,122.6 335.7,58 3756.04,58 3824.89,126.85 ; 3977.4,271.1 4043,336.7 4043,3713.3 3977.4,3778.9
  Bottom Layer w50: 122.6,271.1 H2.1@126.85,266.85 ; 122.6,3778.9 H3.1@126.85,3783.15 ; 3824.89,126.85 H1.1@3833.15,126.85 ; 3828.9,3927.4 H4.1@3833.15,3923.15 ; H1.1@3973.15,266.85 3977.4,271.1
GND: "Heat Power.2" "Heat Power.4" "Motor Power.2" C1_ES1.2 C1_ES2.2 C1_ES3.2 C2_ES1.2 C2_ES2.2 C2_ES3.2 C3_M1.2 C3_M2.2 C3_M3.2 C3_M4.2 C3_M5.2 C4.1 C5_M1.2 C5_M2.2 C5_M3.2 C5_M4.2 C5_M5.2 C6_M1.2 C6_M2.2 C6_M3.2 C6_M4.2 C6_M5.2 C7.2 C8_M1.2 C8_M2.2 C8_M3.2 C8_M4.2 C8_M5.2 C9.2 C10.2 C11.2 C12_M1.1 C12_M2.1 C12_M3.1 C12_M4.1 C12_M5.1 C13.1 C14_M1.1 C14_M2.1 C14_M3.1 C14_M4.1 C14_M5.1 C15.2 C16.2 C17.2 C18.2 C19.1 C20.2 C21.2 C22.2 C23.1 C25.1 C26.2 C27.1 C28.1 C30_TR1.1 C30_TR2.1 C31_TC1.1 C31_TC2.1 C32.1 C33.1 C36.1 C37.1 C38.1 C39.1 C41.1 C42.1 C43.1 C44.1 C45.1 C46.1 C47.1 C48.1 C53.1 C54.1 C55.1 C56.1 C57.1 C60.1 C61.1 C63.1 C64.1 C65.1 C71_M1.1 C71_M2.1 C71_M3.1 C71_M4.1 C71_M5.1 C73.1 C75_M1.1 C75_M2.1 C75_M3.1 C75_M4.1 C75_M5.1 D1.1 D4.1 D5_TR1.1 D5_TR2.1 D6.1 D7.C D9.C D20_M1.C D20_M2.C D20_M3.C D20_M4.C D20_M5.C D21_M1.C D21_M2.C D21_M3.C D21_M4.C D21_M5.C D22_M1.C D22_M2.C D22_M3.C D22_M4.C D22_M5.C D23_M1.C D23_M2.C D23_M3.C D23_M4.C D23_M5.C DA1.3 DA2.3 DA3.3 EXP0.10 EXP0.11 EXP1.10 EXP1.11 EXP2.10 EXP2.11 JTAG/DEBUG.3 JTAG/DEBUG.5 JTAG/DEBUG.9 MAX1_ES1.2 MAX1_ES2.2 MAX1_ES3.2 MIN1_ES1.2 MIN1_ES2.2 MIN1_ES3.2 P2_TR1.2 P2_TR2.2 Q2.2 Q3.2 Q4.1 Q4.2 Q4.3 Q5.1 Q5.2 Q5.3 Q6.1 Q6.2 Q6.3 Q7.1 Q7.2 Q7.3 R4.2 R9.1 R12.2 R23.1 R32_M1.1 R32_M2.1 R32_M3.1 R32_M4.1 R32_M5.1 R33_M1.1 R33_M2.1 R33_M3.1 R33_M4.1 R33_M5.1 R46.2 R55.2 R59.2 R63.2 R67.2 R71.2 S1.2 U1.5 U1.7 U1.11 U2.2 U2.4 U3.12 U3.33 U3.44 U3.46 U3.54 U3.58 U3.74 U3.106 U3.126 U4_TC1.1 U4_TC2.1 U6.9 U6.15 U7_M1.14 U7_M1.28 U7_M1.29 U7_M2.14 U7_M2.28 U7_M2.29 U7_M3.14 U7_M3.28 U7_M3.29 U7_M4.14 U7_M4.28 U7_M4.29 U7_M5.14 U7_M5.28 U7_M5.29 U8.9 | length 8365.3
  Top Layer w10: v1(150,440) 172.23,440 C3_M1.2@189.97,422.26 ; C5_M1.2@289.97,422.26 289.97,400.03 v1(300,390) ; C63.1@315,3177.44 316.44,3176 v1(360,3176) ; C8_M1.2@467.51,421.26 467.51,392.49 490,370 ; C6_M1.2@567.51,421.26 598.74,421.26 v1@615,405 ; C75_M1.1@622.48,758.7 v3(622.48,790) ; R55.2@798.4,3463.13 R55.2@806,3455.53 ; v1(845,440) 867.23,440 C3_M2.2@884.97,422.26 ; v1(970,2166.1) 1005,2166.1 1021,2150.1 1073.56,2150.1 1105,2118.66 C54.1@1156.22,2118.66 ; v1(984.97,385.03) C5_M2.2@984.97,422.26 ; v1(1162.51,385) C8_M2.2@1162.51,421.26 ; C6_M2.2@1262.51,421.26 1293.74,421.26 v1@1310,405 ; C41.1@1309.8,2271.1 1333.23,2271.1 1360.55,2298.43 U3.46@1469.65,2298.43 1539.84,2298.43 v1(1551.1,2309.68) ; C75_M2.1@1317.48,758.7 v3(1317.48,790) ; C43.1@1412.56,2731.1 C44.1@1457.44,2731.1 1457.44,2693.66 v1(1470,2681.1) ; v1(1455,1515) 1442.44,1527.56 C64.1@1442.44,1555 1415,1582.44 1415,1617.56 C65.1@1442.44,1645 1477.44,1680 1520,1680 1535,1665 1544.61,1665 1560.2,1680.58 U3.74@1560.2,1715.75 1560.2,1757.01 1546.1,1771.1 ; U3.58@1469.65,2062.2 1516.1,2062.2 ; U3.54@1469.65,2140.94 1529.84,2140.94 1545,2156.1 v1(1575,2156.1) ; U3.44@1469.65,2337.8 1526.69,2337.8 v1(1545,2356.1) ; v1(1540,440) 1562.23,440 C3_M3.2@1579.97,422.26 ; v1(1629.72,2446.1) 1599.57,2476.26 U3.33@1599.57,2546.46 1599.57,2607.99 1586.1,2621.45 1586.1,2650.4 1621.8,2686.1 1671.1,2686.1 1687.56,2702.56 1687.56,2736.1 1692.19,2740.73 1692.19,2756.1 1692.56,2756.47 C32.1@1692.56,2771.1 ; 1679.97,385.03 C5_M3.2@1679.97,422.26 ; v1(1857.51,385) C8_M3.2@1857.51,421.26 ; v1(1955.47,2636.46) C47.1@1986.77,2636.46 1986.77,2620.16 2012.95,2593.98 U3.12@2012.95,2546.46 ; C6_M3.2@1957.51,421.26 1988.74,421.26 v1@2005,405 ; C75_M3.1@2012.48,758.7 v3(2012.48,790) ; C38.1@2084.17,2676.46 2085.47,2677.76 v1(2085.47,2711.46) ; C23.1@2141.1,1582.4 C45.1@2181.1,1582.4 ; v1(2161.1,1781.1) 2190.12,1752.09 U3.106@2190.12,1715.75 ; v1@2230.16,2121.26 U3.126@2300.35,2121.26 ; v1(2235.03,439.97) 2257.26,439.97 C3_M4.2@2275,422.23 ; 2375,385 C5_M4.2@2375,422.23 ; v1(2552.54,384.97) C8_M4.2@2552.54,421.23 ; C6_M4.2@2652.54,421.23 2683.77,421.23 v1@2700.03,404.97 ; C75_M4.1@2707.51,758.67 v3(2707.51,789.97) ; U8.9@2802.57,2928.66 2802.57,2847.87 v1(2803,2847.44) ; C2_ES1.2@2922.56,1525 v1(2960,1525) ; v1(2930.03,439.97) 2952.26,439.97 C3_M5.2@2970,422.23 ; v1(2975,2965) 2975,3003.33 R12.2@2978.32,3006.65 ; v1@3024.83,3162.91 U1.5@3024.83,3185.06 ; DA1.3@3050,1442.6 v1(3050,1530) ; 3070,385 C5_M5.2@3070,422.23 ; C31_TC2.1@3103.7,2360 v1(3140,2360) ; v1(3135,1525) C1_ES1.2@3172.91,1525 ; v1(3247.54,384.97) C8_M5.2@3247.54,421.23 ; C2_ES3.2@3329,1525 v1(3375,1525) ; C6_M5.2@3347.54,421.23 3378.77,421.23 v1@3395.03,404.97 ; C75_M5.1@3402.51,758.67 v3(3402.51,789.97) ; DA3.3@3465,1447.6 v1(3465,1535) ; v1(3555,1525) C1_ES3.2@3592.91,1525 ; v1(3570,2155) C30_TR2.1@3570,2187.44 3570.98,2188.43 D5_TR2.1@3630,2188.43 ; C2_ES2.2@3752.56,1525 v1(3790,1525) ; DA2.3@3880,1447.6 v1(3880,1535) ; C30_TR1.1@3905,2187.44 3905.98,2188.43 D5_TR1.1@3965,2188.43 ; v1(3970,1525) C1_ES2.2@4007.91,1525
  Top Layer w12: 3112.95,3083 3131.36,3101.41 3182.42,3101.41 3246.88,3165.87 3246.88,3196.35 3238.49,3204.74 U1.7@3213.8,3204.74
  Top Layer w15: C12_M1.1@492.48,1198.7 v3(616.18,1198.7) ; U6.9@1080.12,2550 v1(1160,2550) ; U6.15@1080.12,2850 1190,2850 1197.56,2857.56 v1@1262.44,2857.56 ; v1(1140,2465) 1142.68,2462.32 C73.1@1183.54,2462.32 1181.57,2460.35 R23.1@1181.57,2411.1 ; v1(1160,2375) C61.1@1160,2343.7 1186.14,2343.7 C60.1@1206.1,2363.66 ; C28.1@1175,2252.56 1192.44,2270 v1(1210,2270) ; C12_M2.1@1187.48,1198.7 v3(1311.18,1198.7) ; C53.1@1220,2233.7 1210,2243.7 v1(1210,2270) ; C37.1@1265,2133.7 1284.96,2153.66 1305,2153.66 1321.34,2170 v2(1345,2170) ; C41.1@1311.1,2272.4 1309.8,2271.1 1295,2271.1 1285.47,2280.63 1266.1,2280.63 R4.2@1265,2279.53 1244.53,2279.53 1235,2270 v1(1210,2270) ; v1(1350,1765) C27.1@1350,1703.7 1375.04,1703.7 C13.1@1395,1723.66 1397.44,1726.1 1481.1,1726.1 1526.1,1771.1 1546.1,1771.1 ; 1516.1,2062.2 v1(1550,2096.1) ; C12_M3.1@1882.48,1198.7 v3(2006.18,1198.7) ; C46.1@2370,2143.7 2410,2143.7 C39.1@2440,2113.7 ; JTAG/DEBUG.3@2379.92,2740 v1(2455,2740) ; JTAG/DEBUG.5@2379.92,2790 v1(2455,2790) ; JTAG/DEBUG.9@2379.92,2890 v1(2455,2890) ; v1(2465,2687.44) C26.2@2557.44,2687.44 ; C20.2@2510,2951 C17.2@2560,2951 ; C12_M4.1@2577.51,1198.67 v3(2701.21,1198.67) ; v1(2898.76,3365.43) C10.2@2950.31,3365.43 ; v2(2985,2150) U4_TC2.1@3069.49,2150 ; v1@3024.83,3162.91 3045.31,3142.43 C22.2@3045.31,3125.43 ; D7.C@3046.76,3440.43 3046.76,3403.03 3064.32,3385.48 3064.32,3358.87 v1(3080.76,3342.43) C9.2@3134.46,3342.43 ; C9.2@3140.46,3348.43 v1(3187.31,3348.43) C21.2@3243.31,3348.43 ; C12_M5.1@3272.51,1198.67 v3(3396.21,1198.67) ; v1(3300,2150) U4_TC1.1@3384.49,2150 ; C31_TC1.1@3427.56,2355 v1(3450,2355) ; v1(3485,2085) D1.1@3485,2140.63 ; C19.1@3835,2303.7 3865,2333.7 v1(3865,2335) ; v1(3905,2150) C30_TR1.1@3905,2187.44
  Top Layer w25: C11.2@3332.09,3420.43 3347.31,3420.43 v1(3370.31,3397.43)
  Top Layer w35: D20_M1.C@95,511.26 110,496.26 v1(110,445) ; v1(108.74,626.26) D21_M1.C@175,626.26 ; D23_M1.C@582.48,626.26 v1(648.74,626.26) ; v1(667.48,445) D22_M1.C@667.48,511.26 ; v1(790,445) D20_M2.C@790,511.26 ; v1(803.74,626.26) D21_M2.C@870,626.26 ; D23_M2.C@1277.48,626.26 v1(1343.74,626.26) ; v1(1362.48,445) D22_M2.C@1362.48,511.26 ; v1(1485,445) D20_M3.C@1485,511.26 ; v1(1498.74,626.26) D21_M3.C@1565,626.26 ; D23_M3.C@1972.48,626.26 v1(2038.74,626.26) ; v1(2057.48,445) D22_M3.C@2057.48,511.26 ; v1(2180.03,444.97) D20_M4.C@2180.03,511.23 ; v1(2193.77,626.23) D21_M4.C@2260.03,626.23 ; D23_M4.C@2667.51,626.23 v1(2733.77,626.23) ; v1(2752.51,444.97) D22_M4.C@2752.51,511.23 ; v1(2875.03,444.97) D20_M5.C@2875.03,511.23 ; v1(2888.77,626.23) D21_M5.C@2955.03,626.23 ; D23_M5.C@3362.51,626.23 v1(3428.77,626.23) ; v1(3447.51,444.97) D22_M5.C@3447.51,511.23
  other v1: 467.51,385 615,415 1310,415 2005,415 2700.03,414.97 3395.03,414.97 2235,2121.1 1265,2855 815,3080 885,3080 955,3080 1025,3080 1215,3080 1285,3080 1355,3080 1425,3080 1615,3080 1685,3080 1755,3080 1825,3080 2020,3080 2090,3080 2160,3080 2230,3080 1684.5,3129.19 1754.5,3129.19 1824.5,3129.19 2019.5,3129.19 2089.5,3129.19 2159.5,3129.19 2229.5,3129.19 815,3130 885,3130 955,3130 1025,3130 1213.5,3129.61 1283.5,3129.61 1353.5,3129.61 1423.5,3129.61 1615,3130 3031.31,3156.43 2410,3165 2480,3165 2550,3165 2620,3165 2690,3165 2410,3235 2480,3235 2550,3235 2645,3375 2705,3375 2645,3435 2705,3435 2645,3495 2705,3495 2645,3555 2705,3555 355,3600 410,3600 465,3600 520,3600 575,3600 2645,3615 2705,3615 2645,3675 745,3710 785,3710 745,3755 785,3755
  other v2: 2400,2143.7
  other v4: 292.13,926.95 335.43,926.95 378.74,926.95 422.05,926.95 465.35,926.95 987.13,926.95 1030.43,926.95 1073.74,926.95 1117.05,926.95 1160.35,926.95 1682.13,926.95 1725.43,926.95 1768.74,926.95 1812.05,926.95 1855.35,926.95 2377.16,926.92 2420.46,926.92 2463.77,926.92 2507.08,926.92 2550.39,926.92 3072.16,926.92 3115.46,926.92 3158.77,926.92 3202.08,926.92 3245.39,926.92 292.13,970.26 335.43,970.26 378.74,970.26 422.05,970.26 465.35,970.26 987.13,970.26 1030.43,970.26 1073.74,970.26 1117.05,970.26 1160.35,970.26 1682.13,970.26 1725.43,970.26 1768.74,970.26 1812.05,970.26 1855.35,970.26 2377.16,970.23 2420.46,970.23 2463.77,970.23 2507.08,970.23 2550.39,970.23 3072.16,970.23 3115.46,970.23 3158.77,970.23 3202.08,970.23 3245.39,970.23 292.13,1013.57 335.43,1013.57 378.74,1013.57 422.05,1013.57 465.35,1013.57 987.13,1013.57 1030.43,1013.57 1073.74,1013.57 1117.05,1013.57 1160.35,1013.57 1682.13,1013.57 1725.43,1013.57 1768.74,1013.57 1812.05,1013.57 1855.35,1013.57 2377.16,1013.54 2420.46,1013.54 2463.77,1013.54 2507.08,1013.54 2550.39,1013.54 3072.16,1013.54 3115.46,1013.54 3158.77,1013.54 3202.08,1013.54 3245.39,1013.54
  other v5: 3079.94,3185.06 3119.31,3185.06 3158.68,3185.06 3079.94,3224.43 3119.31,3224.43 3158.68,3224.43 3079.94,3263.8 3119.31,3263.8 3158.68,3263.8
  other v6: 3191,3006 3191,3071
GPIO0_EXP: EXP0.7 U3.140
GPIO1_EXP: EXP0.8 U3.139
GPIO2_EXP: EXP0.14 U3.21
GPIO3_EXP: EXP0.13 U3.22
GPIO4_EXP: EXP2.5 U3.59 | length 467.8
  Top Layer w8: v2(1376.1,2042.52) U3.59@1469.65,2042.52
  Bottom Layer w8: 1074.89,1866.1 1199.69,1866.1 v2(1376.1,2042.52)
GPIO5_EXP: EXP2.16 U3.68 | length 383.8
  Top Layer w8: 1112.46,1801.1 1282.46,1801.1 1337.36,1856 1358.11,1856 1367.46,1865.35 U3.68@1469.65,1865.35
I2C_SCL: EXP0.3 EXP2.3 U3.70 | length 1841.8
  Top Layer w8: 1118.68,1786.1 1288.68,1786.1 1343.57,1841 1412.2,1841 1427.21,1825.98 U3.70@1469.65,1825.98 1590.98,1825.98 1617.5,1852.5 1617.5,1952.5 v2(1661.1,1996.1) ; v2(2295,1741.1) 2376.1,1741.1 2389.6,1727.6 2578.5,1727.6 v2(2590,1716.1)
  Bottom Layer w8: v2(1661.1,1996.1) 1683.68,1996.1 1693.68,1986.1 2148.68,1986.1 2236.1,1898.68 2236.1,1800 v2(2295,1741.1) ; v2(2590,1716.1) 2628.68,1716.1